# Altium PCB PC110.PcbDoc (part 5 of 24)
Units mm, origin at the board's own origin, x right, y up, seen from the top; angles counter-clockwise.
Board outline 150.05 x 107.35 mm, 10 copper layers (In2.Cu, F.Cu, B.Cu, In1.Cu, In3.Cu, In4.Cu, In5.Cu, In6.Cu, In7.Cu, In8.Cu); 936 components, 1434 nets, 4891 pads, 6088 vias.
Unrouted connection lines stored in the file: 2995.
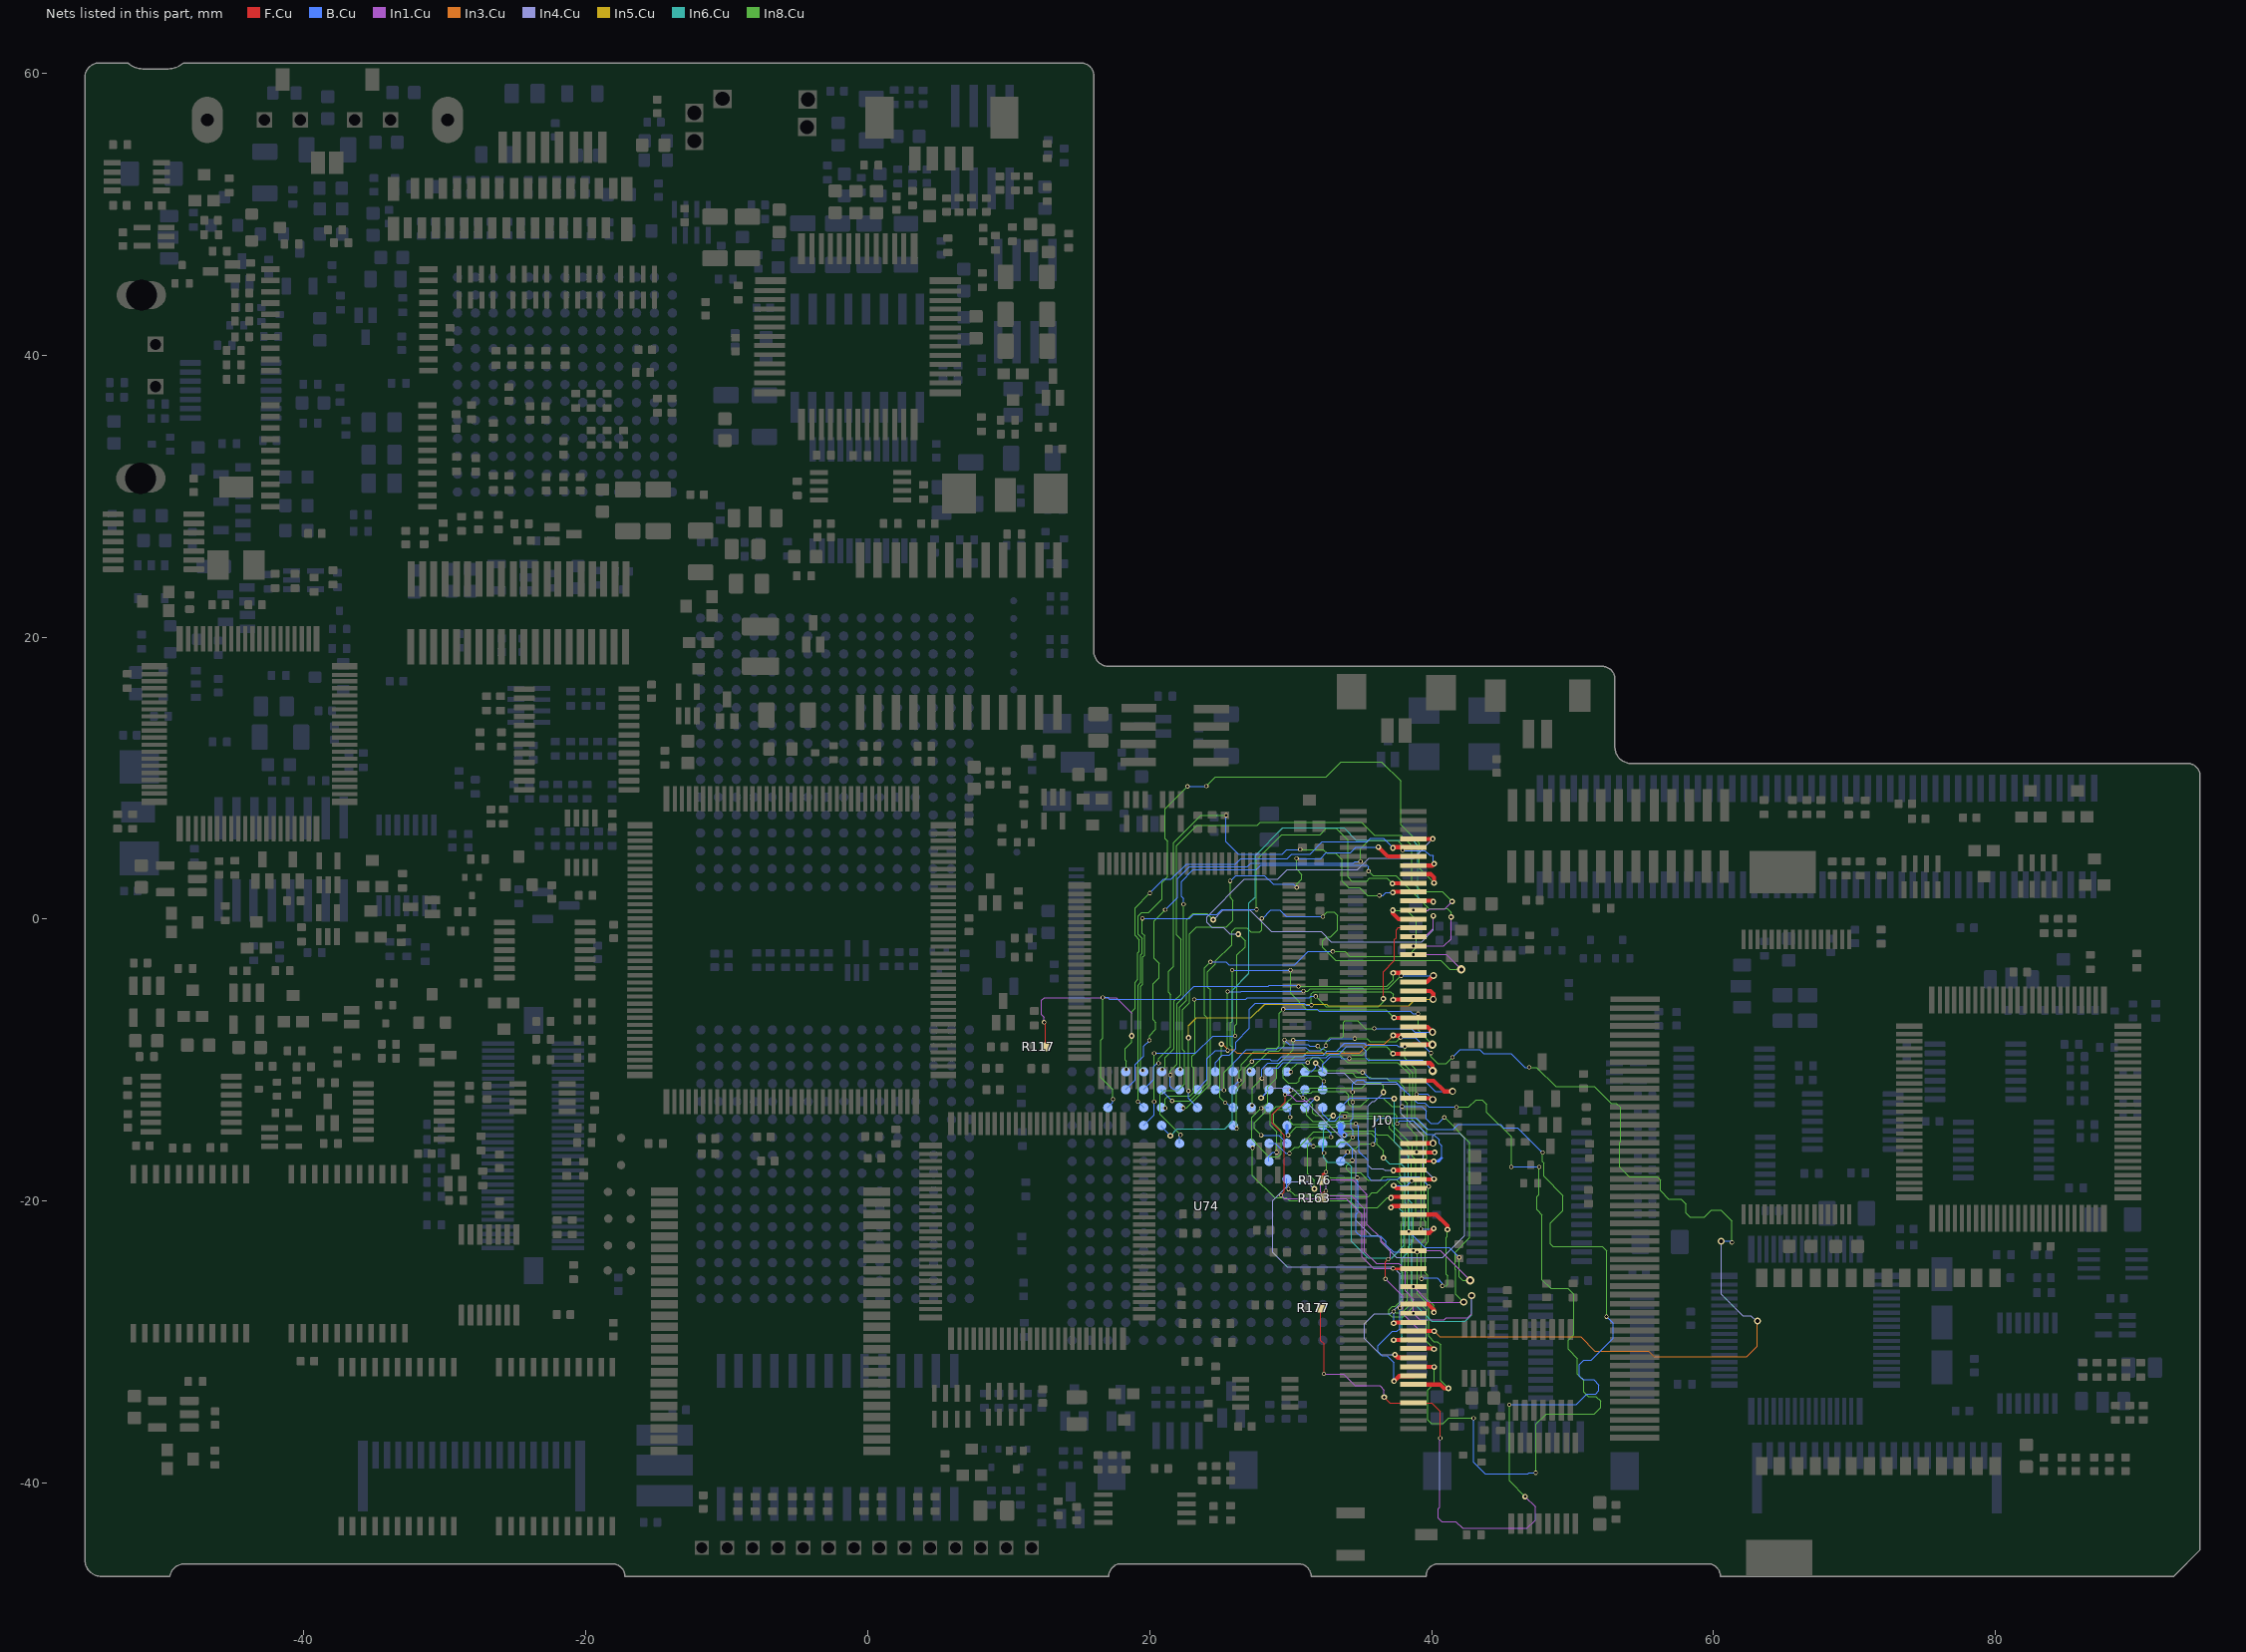
[diagram p12: the nets of this part, all layers, seen from the top]

## Via types
v1: diameter 0.3, hole 0.2, B.Cu to In8.Cu, tented both sides, 1934 vias
v2: diameter 0.4, hole 0.2, F.Cu to B.Cu, tented both sides, 1902 vias
v3: diameter 0.3, hole 0.2, F.Cu to In1.Cu, tented both sides, 1729 vias
v4: diameter 0.6, hole 0.3, F.Cu to B.Cu, tented both sides, 354 vias
v5: diameter 0.5, hole 0.3, F.Cu to B.Cu, tented both sides, 136 vias
v6: diameter 0.4, hole 0.2, B.Cu to In8.Cu, tented both sides, 12 vias
v7: diameter 0.3, hole 0.2, F.Cu to B.Cu, tented both sides, 6 vias
v8: diameter 0.6, hole 0.2, F.Cu to B.Cu, tented both sides, 4 vias
v9: diameter 0.5, hole 0.2, B.Cu to In8.Cu, tented both sides, 3 vias
v10: diameter 0.5, hole 0.2, F.Cu to B.Cu, tented both sides, 2 vias
v11: diameter 0.4, hole 0.3, F.Cu to B.Cu, tented both sides, 2 vias
v12: diameter 0.3, hole 0.2, F.Cu to In4.Cu, tented both sides, 2 vias
v13: diameter 0.6, hole 0.3, B.Cu to In8.Cu, tented both sides, 1 vias
v14: diameter 0.3, hole 0.2, F.Cu to In3.Cu, tented both sides, 1 vias

## Nets (pads, with @x,y where several pads share a name; then routed paths per layer and width w, separated by ;. In a path a pad name is that pad's centre, name@x,y a point inside that pad or via, vN(x,y) a via of type N, cw(c..) or ccw(c..) an arc to the next point about the centre after c; other vN are vias at no path point) (continued)
ACD12: (continued)
  F.Cu w0.3: v2(37.22,2.53) 37.24,2.55 J10.9@38.7,2.55
  In8.Cu w0.08: v1(19.48,0.06) 19.48,-1 19.64,-1.16 19.64,-2.55 19.52,-2.67 19.52,-4.61 19.36,-4.77 19.36,-10.58 v1(19.5,-10.72) ; v1(27.58,0.69) 27.58,4.2 29.38,6 32.08,6 32.53,6.45 33.22,6.45 34.08,5.59 34.08,2.97 34.33,2.72 35.4,2.72 35.59,2.91 36.84,2.91 v2(37.22,2.53)
  B.Cu w0.08: v1(19.48,0.06) 22.82,0.06 23.11,0.35 24.77,0.35 25.11,0.69 v1(27.58,0.69) ; U74.T5@19.5,-10.76 v1(19.5,-10.72) 19.5,-10.73 U74.T5@19.57,-10.8
ACD13: J10.11 U74.N6 | length 44.6
  F.Cu w0.3: J10.11@38.7,1.3 40.05,1.3 v2(40.11,1.24)
  In6.Cu w0.08: v2(21.47,-15.36) 21.95,-14.88 25.32,-14.88 25.86,-14.34 25.86,-5.04 27.05,-3.85 27.05,1.14 27.48,1.57 27.48,4.52 29.44,6.48 33.77,6.48 34.65,5.6 38.65,5.6 39.02,5.23 39.02,1.56 39.34,1.24 v2(40.11,1.24)
  B.Cu w0.08: U74.N6@20.84,-14.61 20.84,-14.73 v2(21.47,-15.36)
ACD14: J10.13 U74.R6 | length 34.3
  F.Cu w0.3: v2(37.24,0.63) 37.24,0.42 37.66,0 J10.13@38.7,0
  In8.Cu w0.08: v1(21.59,-12.89) 22.82,-12.89 24.1,-11.61 24.1,-7.02 23.88,-6.8 23.88,-3.46 v1(24.31,-3.03) ; v1(32.98,-2.29) 33.84,-2.29 34.17,-2.62 38.32,-2.62 38.93,-2.01 38.93,-0.05 38.25,0.63 v2(37.24,0.63)
  B.Cu w0.08: U74.R6@20.84,-12.07 20.84,-12.15 21.58,-12.89 v1(21.59,-12.89) ; v1(24.31,-3.03) 25.42,-3.03 25.63,-3.24 30.28,-3.24 31.23,-2.29 v1(32.98,-2.29)
ACD15: J10.15 U74.T7 | length 34.1
  In1.Cu w0.08: v3(38.7,-1.25) 39.51,-1.25 40.12,-0.64 v2(40.12,0.24)
  In4.Cu w0.08: v2(24.51,-0.04) 25.2,0.65 27.1,0.65 28.62,-0.87 32.15,-0.87 32.88,-1.6 39.29,-1.6 40.12,-0.77 v2(40.12,0.24)
  In8.Cu w0.08: v1(22.17,-10.65) 22.17,-9.48 22.13,-9.44 22.13,-6.23 22.61,-5.75 22.61,-0.07 23.09,0.41 24.06,0.41 v2(24.51,-0.04)
  B.Cu w0.08: U74.T7@22.11,-10.83 U74.T7@22.17,-10.77 ; U74.T7@22.11,-10.8 22.17,-10.74 v1(22.17,-10.65)
ACE1#: J10.14 U74.P6 | length 30.6
  F.Cu w0.08: v2(36.57,-5.64) 36.57,-3.73 37.37,-2.93 37.37,-1.43 37.49,-1.31 37.49,-0.76 37.65,-0.6 J10.14@38.7,-0.6
  In8.Cu w0.08: v1(21.09,-13.4) 21.09,-12.74 21.31,-12.52 22.85,-12.52 23.13,-12.24 23.13,-10.56 23.01,-10.44 23.01,-9.71 23.2,-9.52 23.2,-5.72 v1(23.17,-5.69) ; v1(31.77,-5.47) 32.5,-6.2 36.23,-6.2 36.57,-5.86 v2(36.57,-5.64)
  B.Cu w0.08: U74.P6@20.84,-13.34 20.9,-13.4 v1(21.09,-13.4) ; v1(23.17,-5.69) 26.81,-5.69 26.94,-5.56 31.34,-5.56 31.43,-5.47 v1(31.77,-5.47)
ACE2#: J10.17 U74.P7 | length 41.1
  In1.Cu w0.08: v3(38.7,-2.5) 41.04,-2.5 v4(42.11,-3.57)
  In8.Cu w0.08: v1(22.38,-13.39) 22.6,-13.39 24.3,-11.69 24.3,-5.02 24.1,-4.82 24.1,-3.74 24.66,-3.18 24.66,-2.97 25.82,-1.81 25.82,-0.87 26.08,-0.61 26.88,-0.61 27.19,-0.92 27.8,-0.92 27.95,-0.77 v1(27.95,0.05) ; v1(32.28,0.18) 32.6,0.5 33.08,0.5 33.33,0.25 33.33,-0.75 32.84,-1.24 32.54,-1.24 32.25,-1.53 32.25,-1.99 33.19,-2.93 40.65,-2.93 41.29,-3.57 v4(42.11,-3.57)
  B.Cu w0.08: U74.P7@22.11,-13.34 22.16,-13.39 v1(22.38,-13.39) ; v1(27.95,0.05) 28.01,0.05 28.605,0.645 29.235,0.645 29.7,0.18 v1(32.28,0.18)
ACIORD#: J10.21 U74.P8 | length 26.1
  F.Cu w0.3: J10.21@38.7,-5.1 39.93,-5.1 40.11,-5.28 v5(40.11,-5.68)
  In5.Cu w0.08: v2(22.76,-8.41) 22.76,-7.56 23.32,-7 27.19,-7 28.16,-6.03 32.56,-6.03 32.66,-6.13 38.39,-6.13 38.84,-5.68 v5(40.11,-5.68)
  In8.Cu w0.08: v1(22.75,-12.18) 22.76,-12.17 v2(22.76,-8.41)
  B.Cu w0.08: v1(22.75,-12.18) 22.75,-12.71 U74.P8@23.38,-13.34